# Altium PCB Hall_measurement_ver2.PcbDoc (part 1 of 2)
Units mm, origin at the board's own origin, x right, y up, seen from the top; angles counter-clockwise.
Board outline 60 x 140 mm, 4 copper layers (Top Layer, GND, Supply, Bottom Layer), stack 0.778 mm thick; 193 components, 95 nets, 656 pads, 140 vias.
Unrouted connection lines stored in the file: 276.
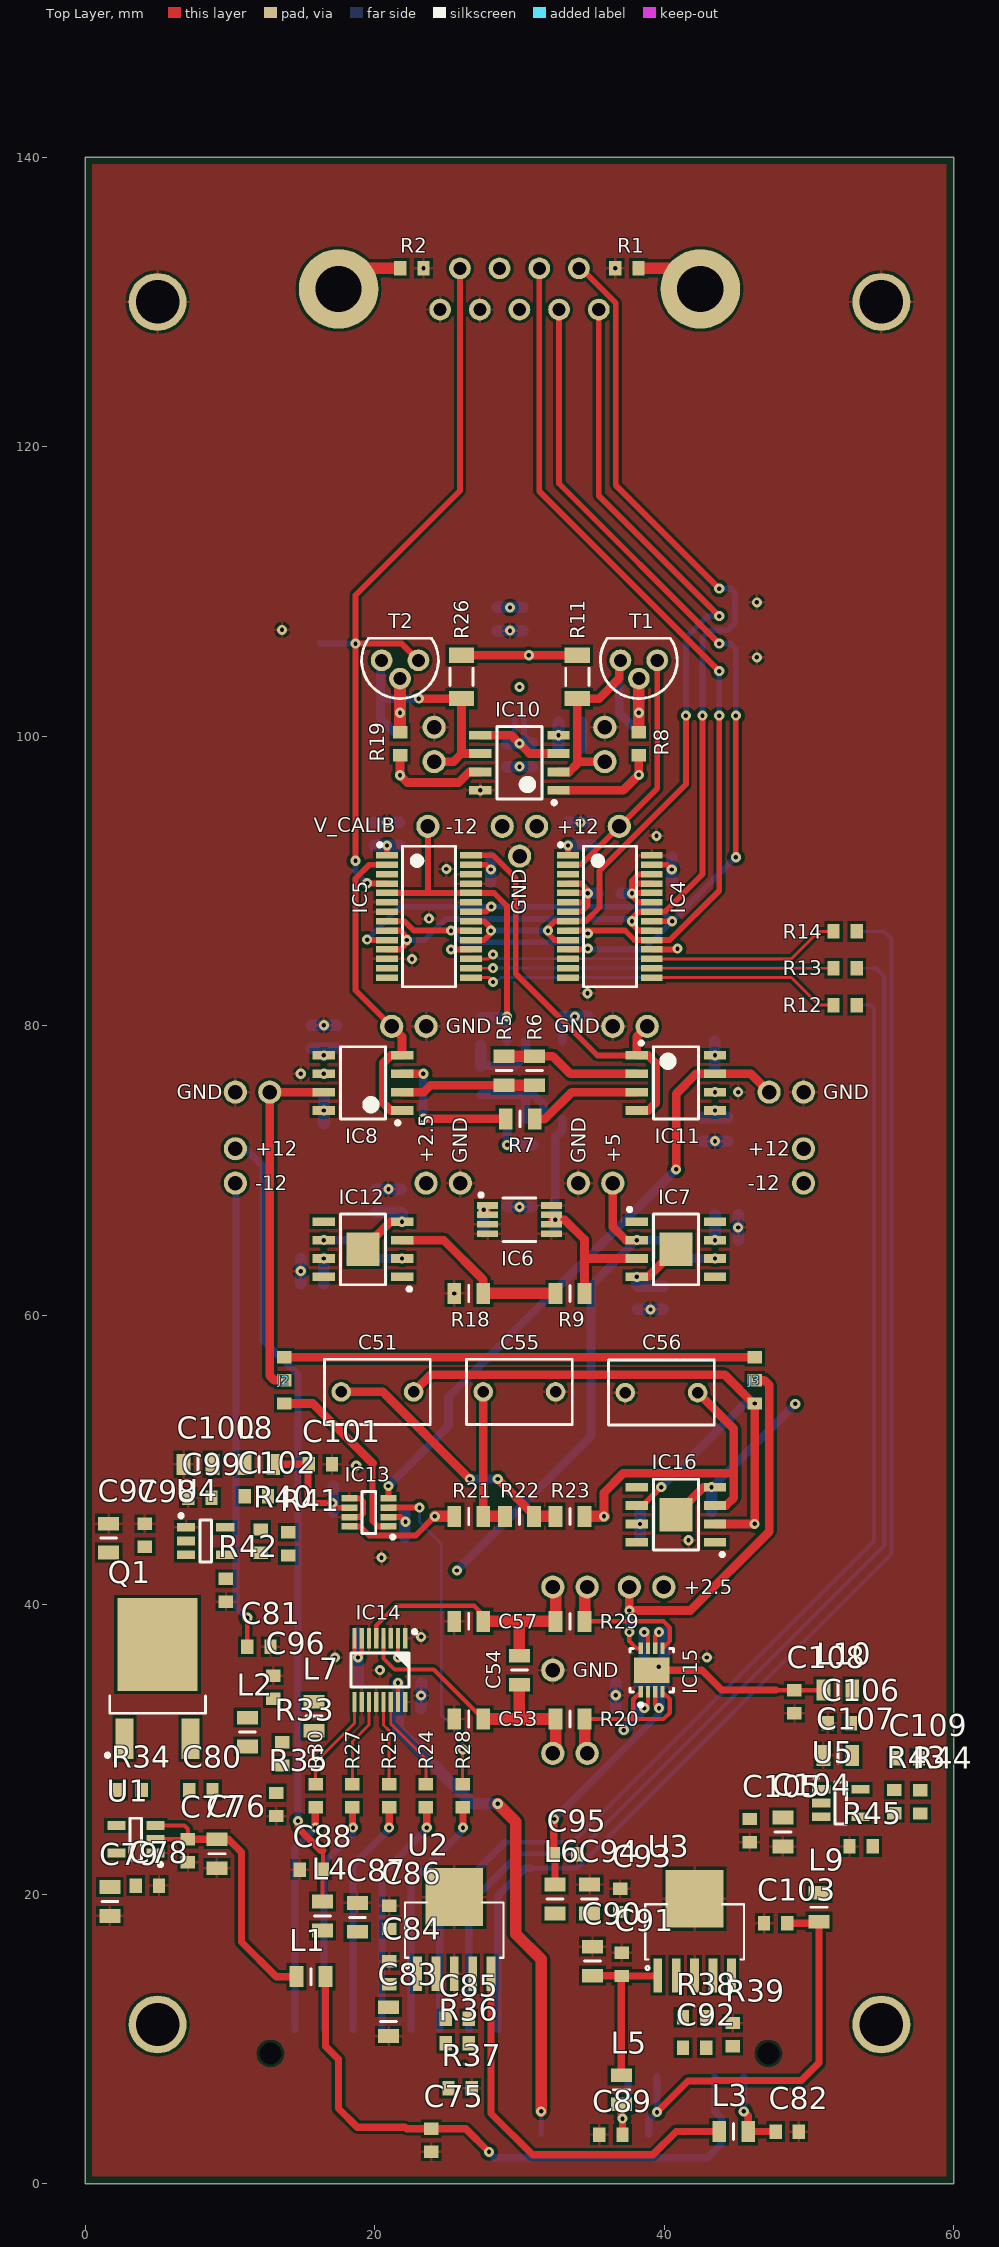
[diagram p0: Top Layer view]
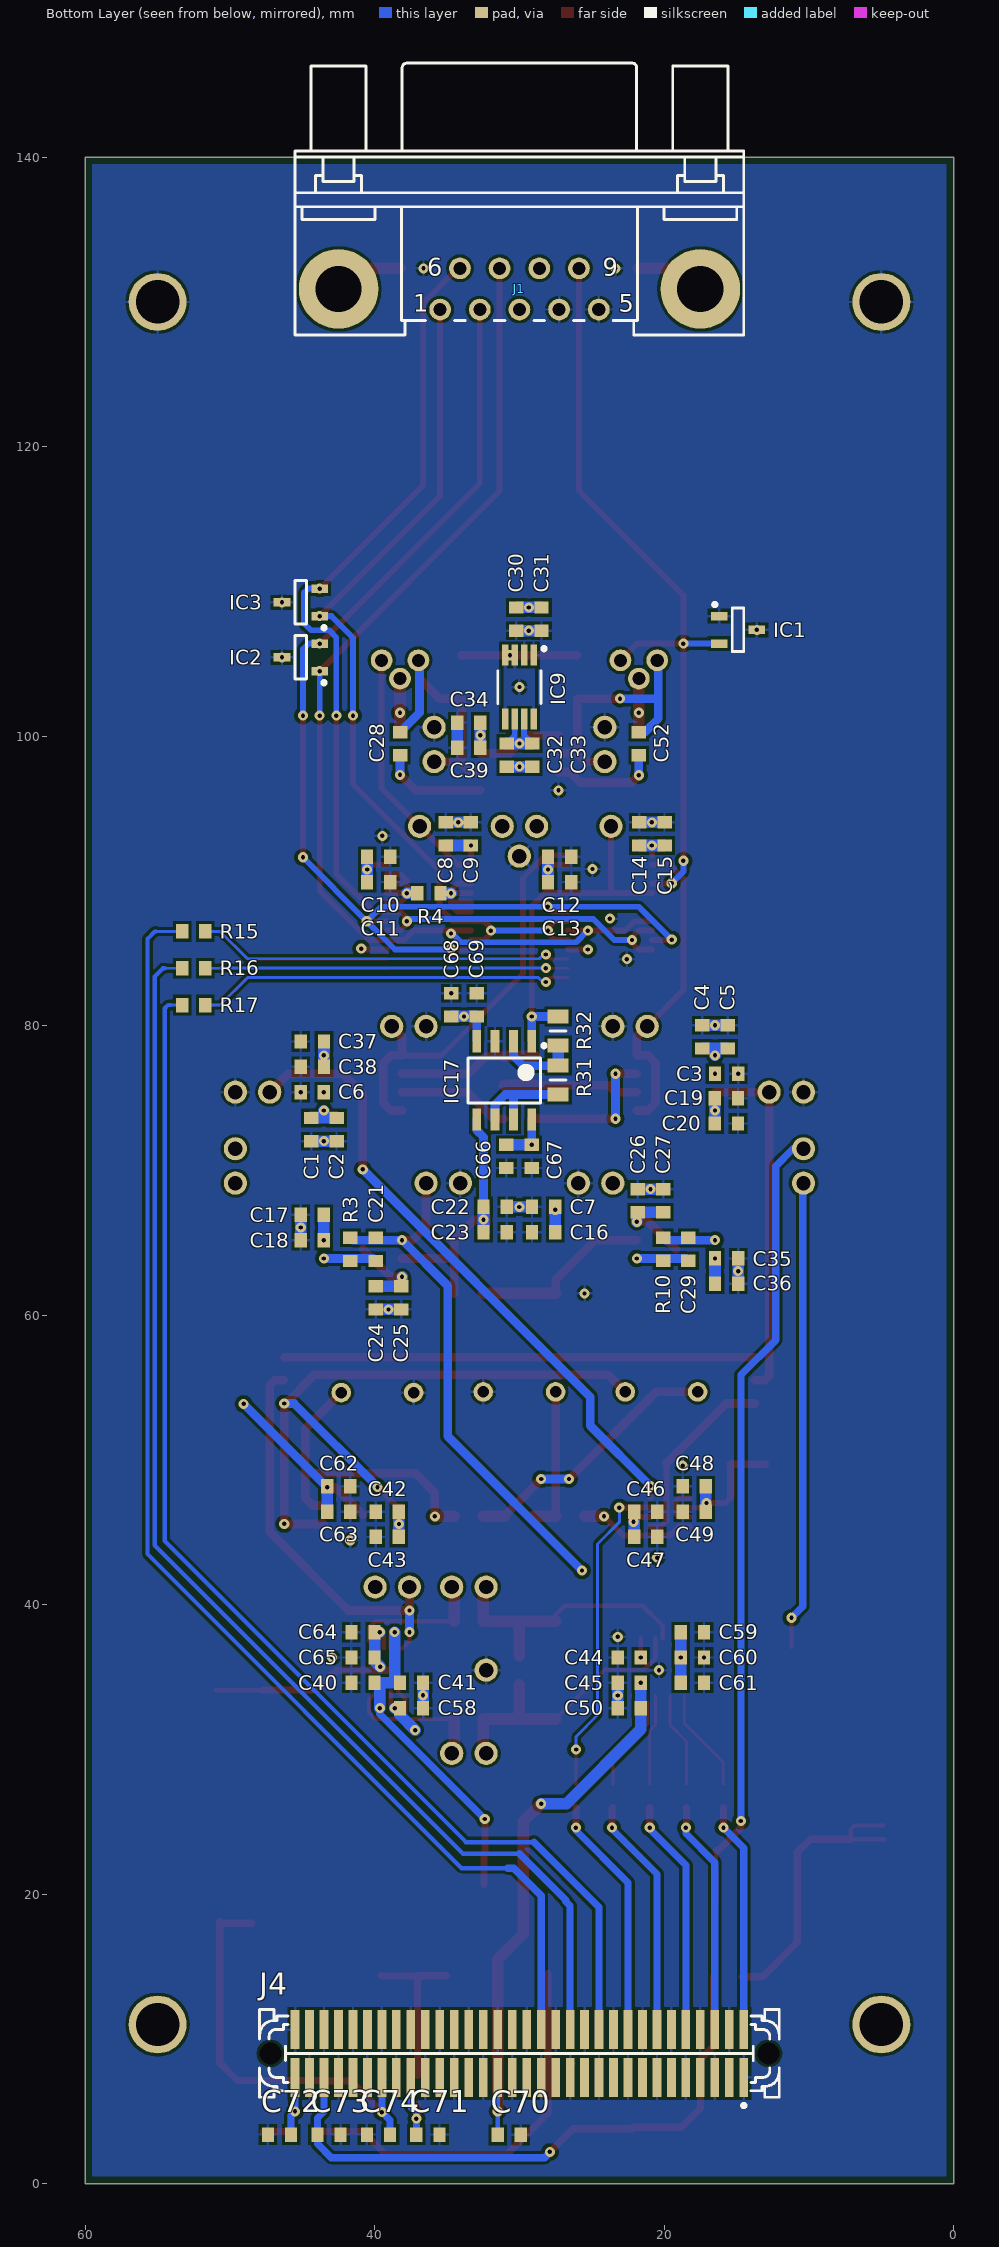
[diagram p1: Bottom Layer view, seen from below]
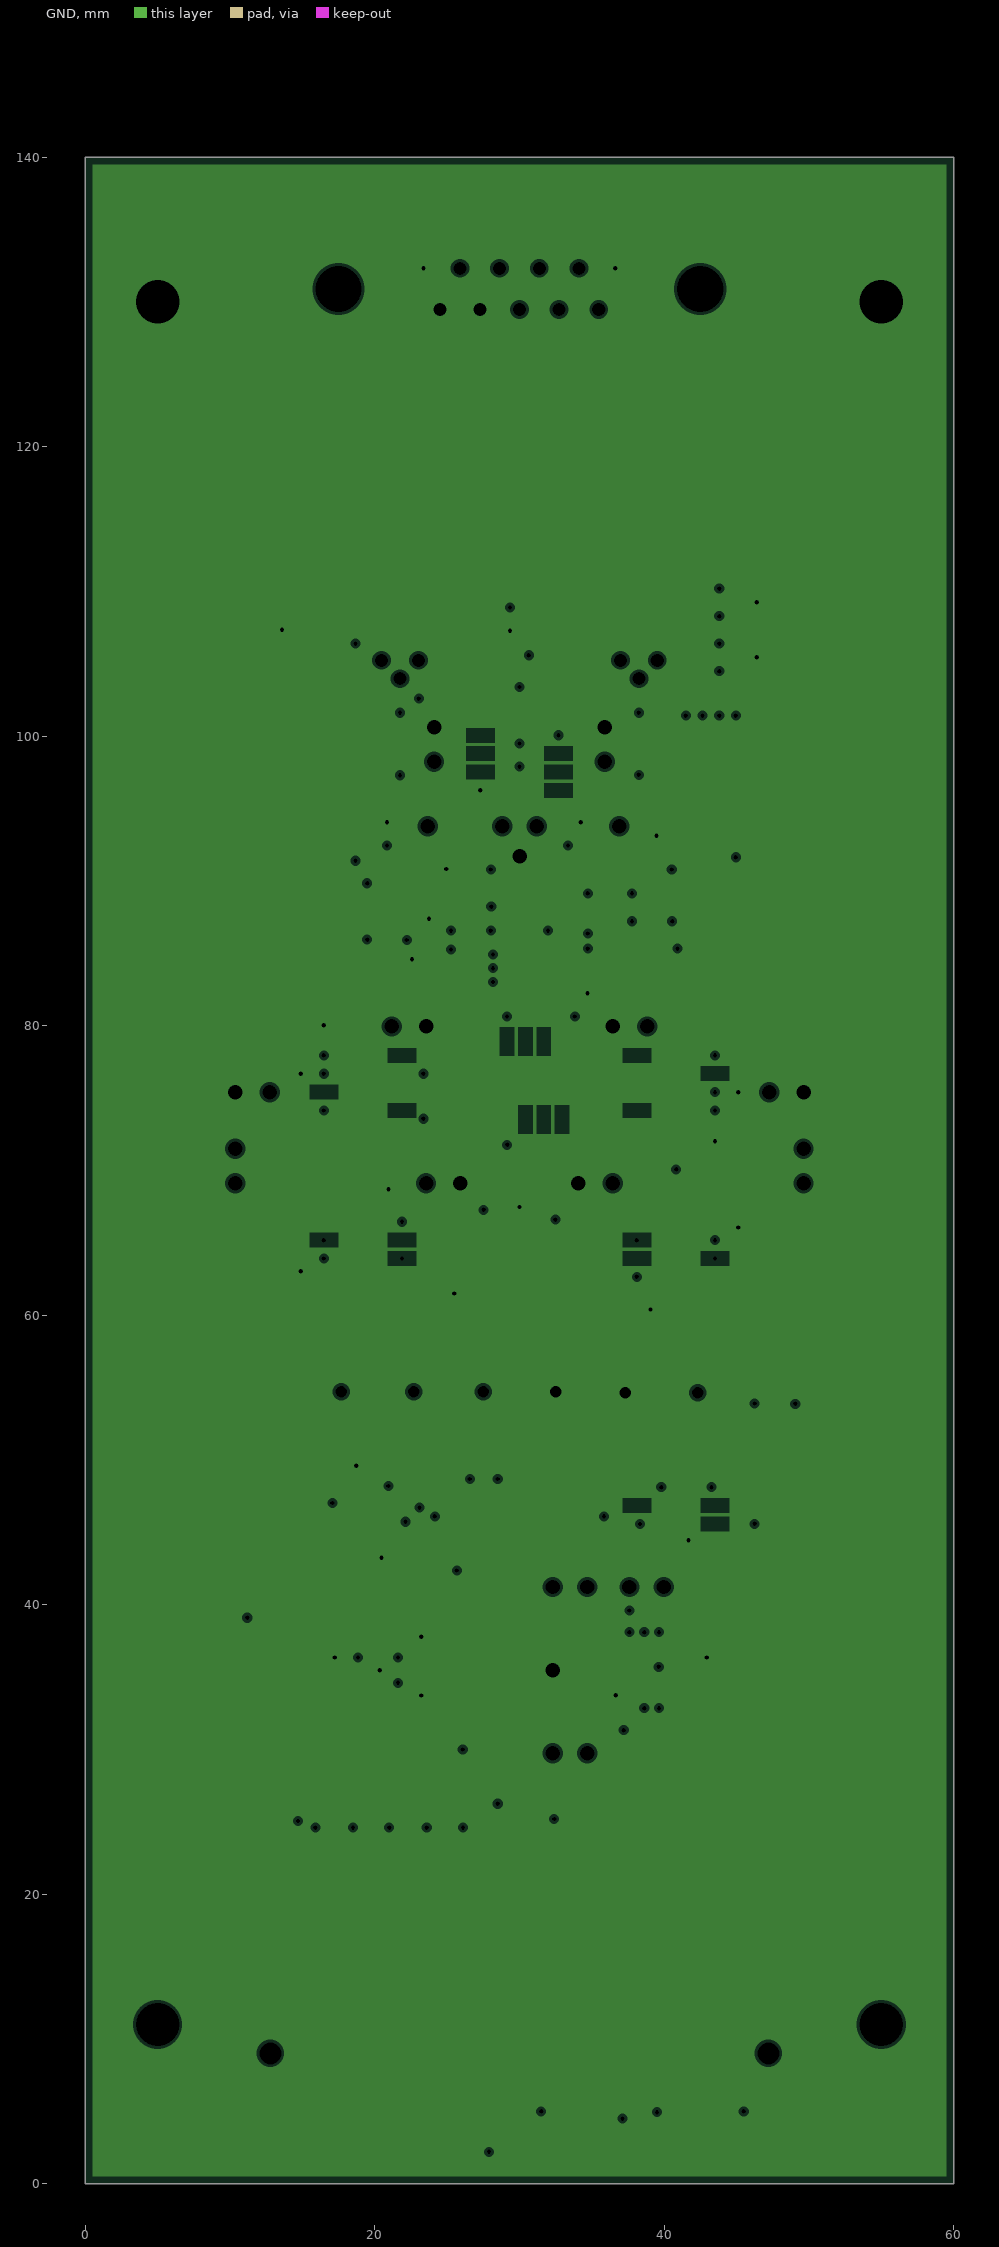
[diagram p2: GND, clearances drawn from the general rule]
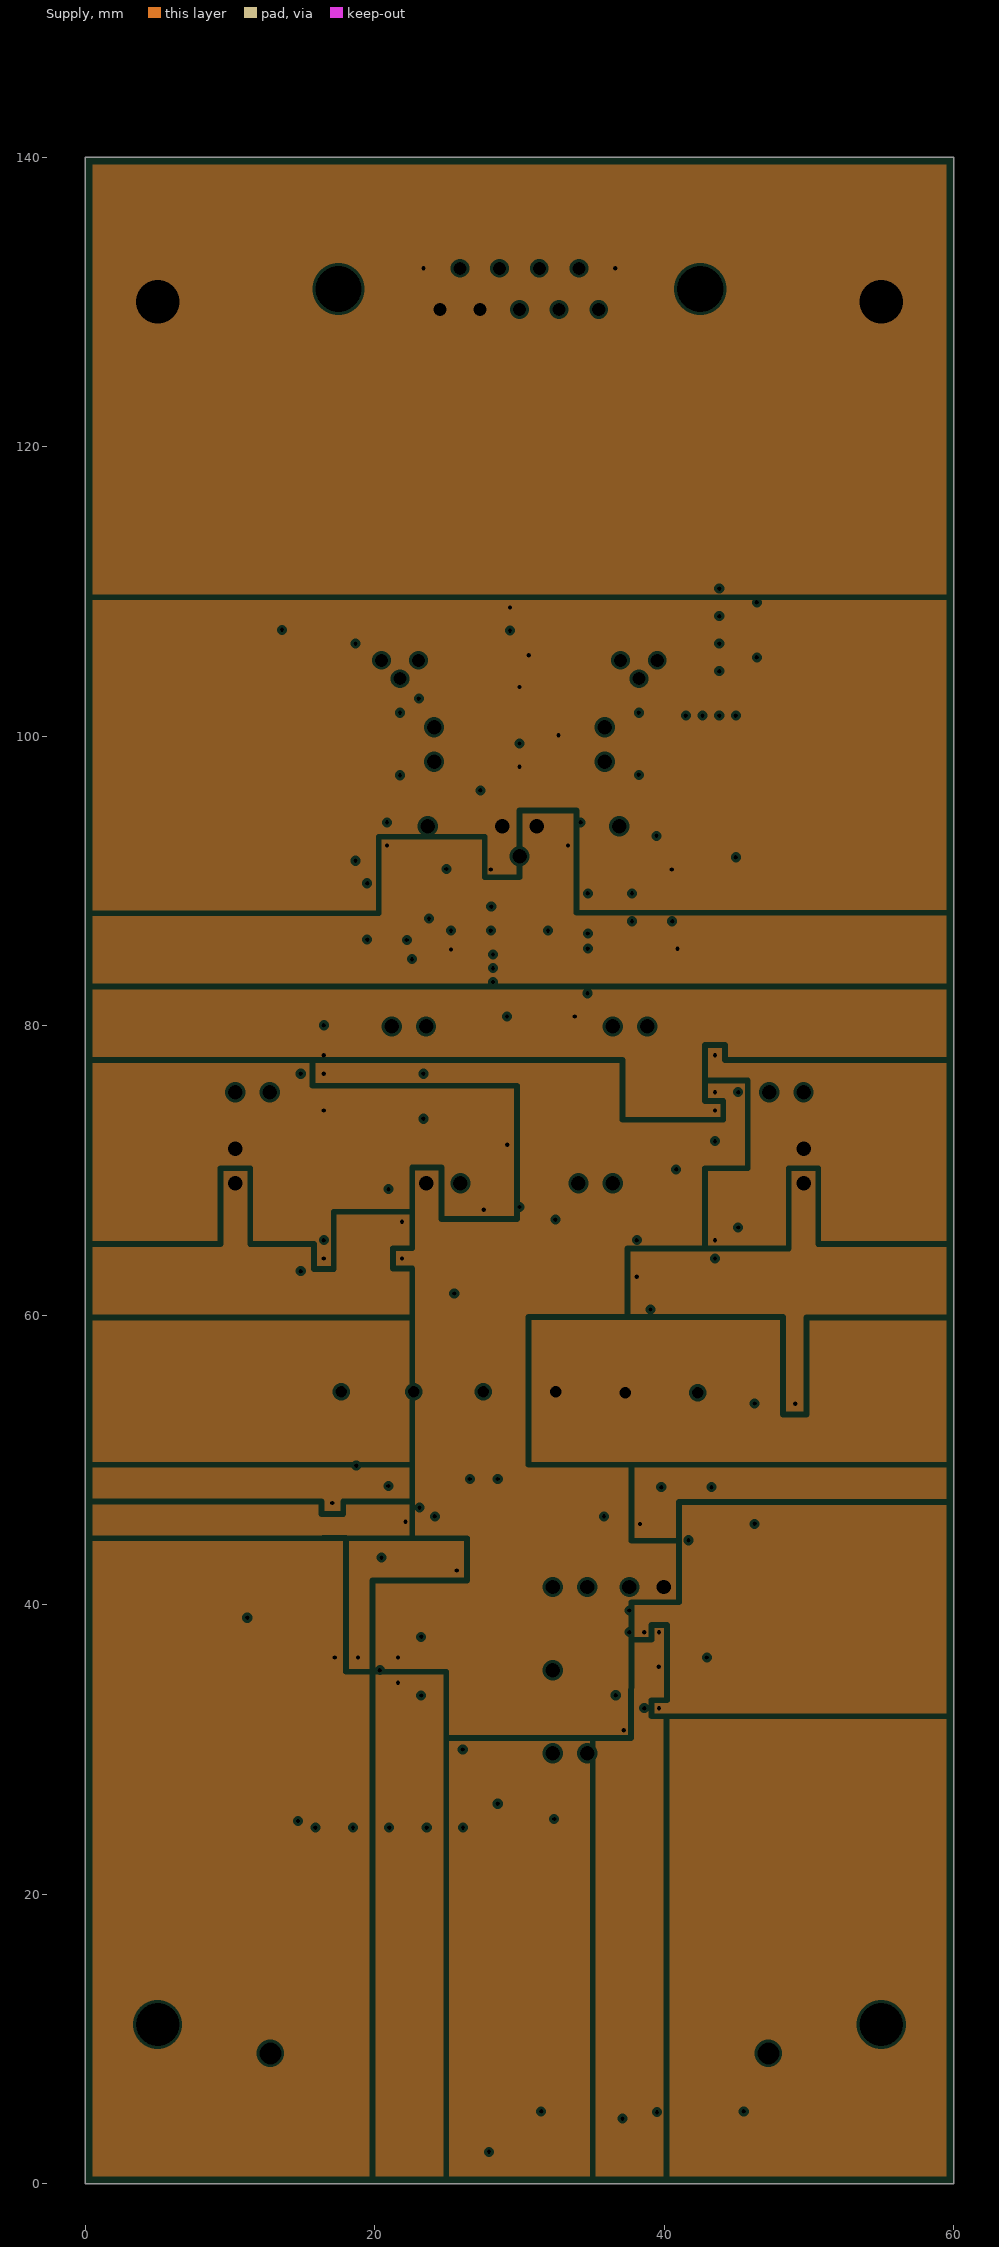
[diagram p3: Supply, clearances drawn from the general rule]
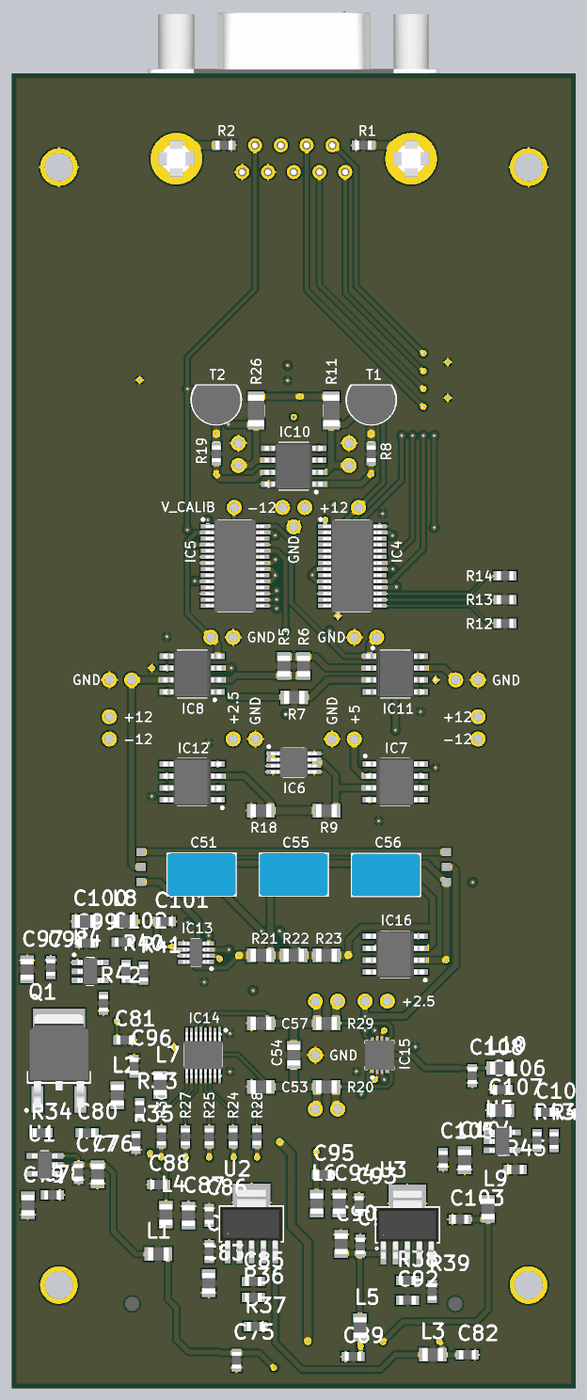
[diagram p5: 3D render of the assembled board from above, using the file's embedded part models]
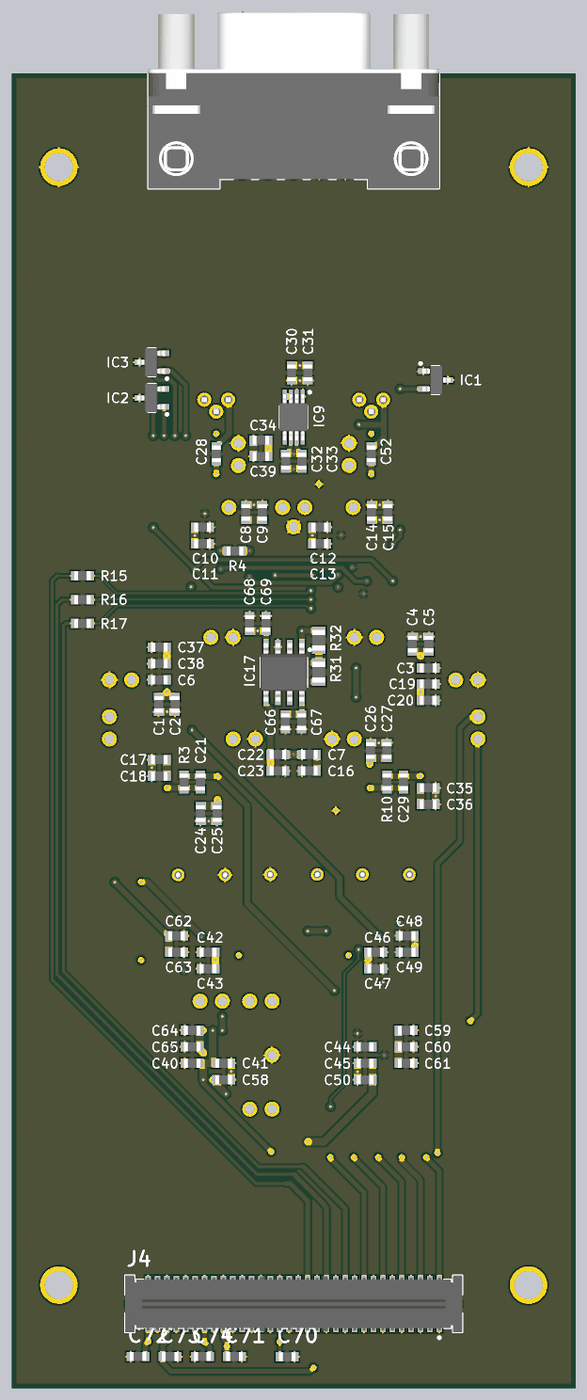
[diagram p6: 3D render of the assembled board from below, using the file's embedded part models]

## Layer stack, top to bottom
Top Solder: solder mask 0.0102, Solder Resist, Dk 3.5
Top Layer: signal copper 0.0356
Dielectric 1: core 0.254, FR-4, Dk 4.2
GND: plane copper 0.036, net THERMO_A
Dielectric 3: prepreg 0.127, Dk 4.2
Supply: plane copper 0.036, net (Multiple Nets)
Dielectric 2: core 0.254, Dk 4.2
Bottom Layer: signal copper 0.0356
Bottom Solder: solder mask 0.0102, Solder Resist, Dk 3.5

## Board outline
0,0 60,0 60,140 0,140

## Design rules (kind name [scope] priority, off if disabled: settings)
Clearance [All] p1: gap=0.2 ignorepadtopadclearanceinfootprint=FALSE except(0: Arc-Hole Track-Hole SMDPad-Hole THPad-Hole Via-Hole Fill-Hole Poly-Hole Region-Hole Text-Hole; 0.25: Arc-Via Track-Via SMDPad-Via THPad-Via Via-Via Via-Fill Via-Poly Via-Region)
HoleSize [All] p1: absolutevalues=TRUE maxlimit=3.2 minlimit=0.025 maxpercent=80.000 minpercent=20.000
HoleToHoleClearance [All] p1: gap=0.25 allowstackedmicrovias=TRUE
MinimumSolderMaskSliver [All] p1: minsoldermaskwidth=0.2
PlaneClearance [All] p1: clearance=0.2
PlaneConnect [All] p1: planeconnectstyle=Direct reliefexpansion=0.508 reliefentries=4 reliefconductorwidth=0.254 reliefairgap=0.254
PolygonConnect [All] p1: connectstyle=Relief reliefconductorwidth=0.2 reliefentries=4 polygonreliefangle="90 Angle" airgapwidth=0.2
RoutingVias [All] p1: holewidth=0.3 width=0.7 viastyle="Through Hole" minholewidth=0.3 minwidth=0.7 maxholewidth=1 maxwidth=1.6
SilkToSilkClearance [All] p1: silktosilkclearance=0.2
SilkToSolderMaskClearance [IsPad] p1: minsilkscreentomaskgap=0.2 clearancetoexposedcopper=TRUE
SolderMaskExpansion [All] p1: expansion=0.102
UnRoutedNet [All] p1: checkbadconnections=TRUE
Width [All] p1: maxlimit=1 minlimit=0.2 preferedwidth=0.2
22 further rules are at their usual default settings.

## Classes and differential pairs
component class Hall_LDOs: C75 C77 C78 C79 C80 C81 C82 C83 C84 C85 C86 C87 C88 C89 C90 C91 C92 C93 C94 C95 C96 C97 C98 C99 C100 C101 C102 C103 C104 C105 C106 C107 C108 C109 L1 L2 L3 L4 L5 L6 L7 L8 L9 L10 Q1 R33 R34 R35 R36 R37 R38 R39 R40 R41 R42 R43 R44 R45 U1 U2 U3 U4 U5
component class Hall_measurement: C1 C2 C3 C4 C5 C6 C7 C8 C9 C10 C11 C12 C13 C14 C15 C16 C17 C18 C19 C20 C21 C22 C23 C24 C25 C26 C27 C28 C29 C30 C31 C32 C33 C34 C35 C36 C37 C38 C39 C40 C41 C42 C43 C44 C45 C46 C47 C48 C49 C50 C51 C52 C53 C54 C55 C56 C57 C58 C59 C60 C61 C62 C63 C64 C65 C66 C67 C68 C69 C70 C71 C72 C73 C74 IC1 IC2 IC3 IC4 IC5 IC6 IC7 IC8 IC9 IC10 IC11 IC12 IC13 IC14 IC15 IC16 IC17 J1 J2 J3 J4 R1 R2 R3 R4 R5 R6 R7 R8 R9 R10 R11 R12 R13 R14 R15 R16 R17 R18 R19 R20 R21 R22 R23 R24 R25 R26 R27 R28 R29 R30 R31 R32 T1 T2

## Components (designator, comment, footprint, x,y, rotation, side; value= is the part's Value field where it differs from the comment)
C1 "100n" 0603 44.386,72.828 r270 bottom
C2 "100n" 0603 42.636,72.828 r270 bottom
C3 "100n" 0603 15.69,76.68 r180 bottom
C4 "10u" 0603 17.365,79.23 r270 bottom
C5 "10u" 0603 15.615,79.23 r270 bottom
C6 "10u" 0603 44.31,75.41 r180 bottom
C7 "100n" 0603 28.33,67.48 r0 bottom
C8 "100n" 0603 35.1,93.25 r270 bottom
C9 "10u" 0603 33.35,93.25 r270 bottom
C10 "100n" 0603 39.725,91.675 r0 bottom
C11 "10u" 0603 39.725,89.925 r0 bottom
C12 "100n" 0603 27.225,91.675 r0 bottom
C13 "10u" 0603 27.225,89.925 r0 bottom
C14 "100n" 0603 21.725,93.25 r270 bottom
C15 "10u" 0603 19.975,93.25 r270 bottom
C16 "10u" 0603 28.33,65.731 r0 bottom
C17 "100n" 0603 44.31,66.94 r180 bottom
C18 "10u" 0603 44.31,65.19 r0 bottom
C19 "100n" 0603 15.7,74.995 r0 bottom
C20 "10u" 0603 15.7,73.245 r180 bottom
C21 "=Value" 0603 39.925,64.55 r270 bottom
C22 "100n" 0603 31.68,67.48 r0 bottom
C23 "10u" 0603 31.68,65.73 r0 bottom
C24 "100n" 0603 39.925,61.2 r90 bottom
C25 "10u" 0603 38.175,61.2 r90 bottom
C26 "100n" 0603 21.824,67.91 r270 bottom
C27 "10u" 0603 20.075,67.91 r270 bottom
C28 "=Value" 0603 38.25,99.475 r270 bottom
C29 "=Value" 0603 18.324,64.56 r270 bottom
C30 "100n" 0603 30.225,108.095 r270 bottom
C31 "10u" 0603 28.475,108.095 r270 bottom
C32 "100n" 0603 30.875,98.695 r90 bottom
C33 "10u" 0603 29.125,98.695 r90 bottom
C34 "100n" 0603 33.5,100.945 r180 bottom
C35 "100n" 0603 15.689,63.92 r180 bottom
C36 "10u" 0603 15.689,62.17 r0 bottom
C37 "100n" 0603 44.3,78.91 r180 bottom
C38 "10u" 0603 44.3,77.16 r0 bottom
C39 "10u" 0603 33.5,99.195 r0 bottom
C40 "100n" 0603 40.808,34.605 r180 bottom
C41 "10u" 0603 37.458,34.605 r180 bottom
C42 "100n" 0603 39.135,46.43 r180 bottom
C43 "10u" 0603 39.135,44.68 r0 bottom
C44 "100n" 0603 22.411,36.355 r180 bottom
C45 "100n" 0603 22.411,34.605 r0 bottom
C46 "100n" 0603 21.274,46.43 r0 bottom
C47 "10u" 0603 21.274,44.68 r0 bottom
C48 "100n" 0603 17.924,48.18 r180 bottom
C49 "10u" 0603 17.924,46.43 r180 bottom
C50 "10u" 0603 22.411,32.855 r0 bottom
C51 "1u" CAPR500-450X730X950 20.189,54.705 r0 top
C52 "=Value" 0603 21.75,99.475 r270 bottom
C53 "3.9n" 0805 26.5,32.105 r180 top
C54 "3.9n" 0805 30,35.48 r270 top
C55 "1u" CAPR500-450X730X950 30,54.705 r180 top
C56 "1u" CAPR500-450X730X950 39.81,54.655 r0 top
C57 "3.9n" 0805 26.5,38.855 r0 top
C58 "100n" 0603 37.457,32.855 r0 bottom
C59 "22u" 0603 18.048,38.105 r0 bottom
C60 "22u" 0603 18.048,36.355 r0 bottom
C61 "22u" 0603 18.048,34.605 r0 bottom
C62 "100n" 0603 42.485,48.18 r0 bottom
C63 "10u" 0603 42.485,46.43 r180 bottom
C64 "100n" 0603 40.808,38.105 r180 bottom
C65 "10u" 0603 40.808,36.355 r0 bottom
C66 "100n" 0603 30.9,70.97 r90 bottom
C67 "10u" 0603 29.15,70.97 r270 bottom
C68 "100n" 0603 34.705,81.44 r270 bottom
C69 "10u" 0603 32.955,81.44 r90 bottom
C70 "100n" 0603 30.7,3.375 r0 bottom
C71 "100n" 0603 36.319,3.4 r0 bottom
C72 "100n" 0603 46.575,3.4 r180 bottom
C73 "100n" 0603 43.156,3.4 r0 bottom
C74 "100n" 0603 39.737,3.4 r180 bottom
C75 "100n" 0603 23.9,3 r90 top
C76 "2u2" 0805 9.1,22.8 r90 top
C77 "100n" 0603 7.1,23 r90 top
C78 "100n" 0603 4.3,20.6 r180 top
C79 "2u2" 0805 1.7,19.5 r90 top
C80 "100n" 0603 8,27.2 r0 top
C81 "100n" 0603 12,37.1 r180 top
C82 "100n" 0603 48.5,3.6 r180 top
C83 "2u2" 0805 20.959,11.2 r90 top
C84 "100n" 0603 21,14.575 r270 top
C85 "10n" 0603 25.7,11.4 r180 top
C86 "100n" 0603 21,18.4 r270 top
C87 "2u2" 0805 18.8,18.4 r270 top
C88 "100n" 0603 15.625,21.7 r0 top
C89 "100n" 0603 36.319,3.4 r0 top
C90 "2u2" 0805 35.05,15.375 r270 top
C91 "100n" 0603 37.075,15.15 r270 top
C92 "10n" 0603 42.1,9.4 r180 top
C93 "100n" 0603 36.95,19.575 r270 top
C94 "2u2" 0805 34.85,19.675 r270 top
C95 "100n" 0603 33.175,22.775 r180 top
C96 "100n" 0603 13,34.3 r270 top
C97 "2u2" 0805 1.625,44.6 r270 top
C98 "100n" 0603 4.125,44.8 r270 top
C99 "100n" 0603 7.925,47.4 r0 top
C100 "2u2" 0805 7.8,49.7 r0 top
C101 "100n" 0603 16.25,49.7 r180 top
C102 "100n" 0603 11.825,47.5 r180 top
C103 "100n" 0603 47.7,18 r0 top
C104 "2u2" 0805 48.2,24.3 r90 top
C105 "100n" 0603 45.9,24.4 r90 top
C106 "100n" 0603 52.1,31.8 r0 top
C107 "2u2" 0805 52,29.6 r0 top
C108 "100n" 0603 49,33.3 r90 top
C109 "100n" 0603 56.8,29.4 r180 top
IC1 "PESD12VL2BT" SOT95P280X115-3N 14.9,107.345 r180 bottom
IC2 "PESD12VL2BT" SOT95P280X115-3N 45.1,105.445 r0 bottom
IC3 "PESD12VL2BT" SOT95P280X115-3N 45.1,109.245 r0 bottom
IC4 "ADG1207" SOP65P640X120-28N 36.25,87.545 r0 top
IC5 "ADG1207" SOP65P640X120-28N 23.75,87.545 r0 top
IC6 "LTC6655B-5" SOP65P488X110-8N 30,66.605 r0 top
IC7 "ADA4898-1" SOIC127P600X175-9N-S229 40.81,64.555 r0 top
IC8 "AD8429" SOIC127P600X175-8N 19.191,76.045 r180 top
IC9 "LTC6655B-5" SOP65P488X110-8N 30,103.395 r270 bottom
IC10 "AD8676" SOIC127P600X175-8N 30,98.165 r180 top
IC11 "AD8429" SOIC127P600X175-8N 40.81,76.045 r0 top
IC12 "ADA4898-1" SOIC127P600X175-9N-S229 19.189,64.555 r180 top
IC13 "MAX4564" SOT65P280X100-8N 19.599,46.38 r180 top
IC14 "LTC2379-18" SOP50P490X110-16N 20.361,35.48 r270 top
IC15 "LT6350" SON50P300X300X80-9N-R175X248 39.132,35.48 r90 top
IC16 "ADA4898-1" SOIC127P600X175-9N-S229 40.81,46.218 r180 top
IC17 "ADA4522-2" SOIC127P600X175-8N 31.05,76.22 r270 bottom
J1 "=Family" TYCO_5747844-5 30,130.9 r180 bottom
J2 "Jumper" JUMPER 13.75,57.105 r270 top
J3 "Jumper" JUMPER 46.25,57.105 r270 top
J4 "PCI_PMC" TYCO_120527-1 12.8,9 r0 bottom locked
L1 "BLM211k" 0805 15.6,14.3 r180 top value=1k
L2 "BLM211k" 0805 11.2,31.2 r90 top value=1k
L3 "BLM211k" 0805 44.8,3.6 r180 top value=1k
L4 "BLM211k" 0805 16.4,18.5 r90 top value=1k
L5 "BLM211k" 0805 37.041,6.49 r90 top value=1k
L6 "BLM211k" 0805 32.45,19.675 r90 top value=1k
L7 "BLM211k" 0805 15.8,32.3 r90 top value=1k
L8 "BLM211k" 0805 12,49.7 r0 top value=1k
L9 "BLM211k" 0805 50.7,19.1 r90 top value=1k
L10 "BLM211k" 0805 52,34.1 r180 top value=1k
Q1 "MJD2955" DPAK 5,34.9 r90 top
R1 "1M" 0603 37.425,132.322 r0 top
R2 "1M" 0603 22.575,132.322 r180 top
R3 "22" 0603 41.675,64.55 r90 bottom
R4 "1k" 0603 36.25,89.145 r0 bottom
R5 "120" 0805 28.95,76.895 r270 top
R6 "120" 0805 31.05,76.895 r270 top
R7 "DNP" 0805 30.05,73.57 r180 top
R8 "22" 0603 38.25,99.475 r90 top
R9 "1k" 0805 33.5,61.505 r0 top
R10 "22" 0603 20.074,64.56 r270 bottom
R11 "5k" 1206 34,104.095 r270 top
R12 "22" 0603 52.5,81.43 r180 top
R13 "22" 0603 52.5,83.97 r180 top
R14 "22" 0603 52.5,86.51 r180 top
R15 "22" 0603 52.5,86.51 r180 bottom
R16 "22" 0603 52.5,83.97 r180 bottom
R17 "22" 0603 52.5,81.43 r180 bottom
R18 "1k" 0805 26.5,61.505 r0 top
R19 "22" 0603 21.75,99.475 r90 top
R20 "22" 0805 33.5,32.105 r180 top
R21 "1k" 0805 26.5,46.105 r0 top
R22 "1k" 0805 30,46.105 r0 top
R23 "1k" 0805 33.5,46.105 r0 top
R24 "22" 0603 23.54,26.8 r270 top
R25 "22" 0603 21,26.8 r270 top
R26 "100k" 1206 26,104.095 r270 top
R27 "22" 0603 18.46,26.8 r270 top
R28 "22" 0603 26.08,26.8 r90 top
R29 "22" 0805 33.5,38.855 r180 top
R30 "22" 0603 15.92,26.8 r270 top
R31 "10k" 0805 27.325,76.245 r90 bottom
R32 "150" 0805 27.325,79.64 r90 bottom
R33 "18k" 0603 13.6,29.7 r90 top
R34 "47k" 0603 3.1,27.2 r0 top
R35 "1k6" 0603 13.2,26.2 r90 top
R36 "16k" 0603 25.7,9.7 r180 top
R37 "1k5" 0603 25.9,6.6 r180 top
R38 "4k7" 0603 42.1,11.5 r180 top
R39 "1k3" 0603 44.725,10.3 r270 top
R40 "47k" 0603 12.125,44.4 r90 top
R41 "15k" 0603 14.025,44.2 r90 top
R42 "12k" 0603 9.725,41 r90 top
R43 "8k2" 0603 55.9,26.4 r90 top
R44 "16k" 0603 57.7,26.375 r90 top
R45 "12k" 0603 53.6,23.3 r0 top
T1 "BS270" TO-92AA-P127 38.25,105.245 r180 top
T2 "BS270" TO-92AA-P127 21.75,105.245 r180 top
U1 "ADP7182ADJ" SOT23-5 3.5,23.8 r180 top value=ADJ
U2 "REG104GAADJ" SOT223_6-127 25.5,17.514 r0 top value=ADJ
U3 "REG104GAADJ" SOT223_6-127 42.1,17.4 r0 top value=ADJ
U4 "ADP7182ADJ" SOT23-5 8.325,44.4 r0 top value=ADJ
U5 "ADP7182ADJ" SOT23-5 52.2,26.3 r0 top value=ADJ

## Footprints (in the part's own frame and the unit in brackets; to place one, negate y for a bottom-side part, rotate by r counter-clockwise, add the part's x,y. Pads: shape width x height; smd on the part's side, far side on the other; paste and mask are expansions set on the pad)
0603 [mm] "Chip Resistor, EIA 0603, Metric 1608, Body 1.6x0.8mm, IPC Medium Density"
  rect 0.85x1 smd: 1(-0.8,0) 2(0.8,0)
  body extent -0.87,-0.47 0.88,0.48, height 0.6
0805 [mm] "Chip Resistor, EIA 0805, Metric 2012, Body 2.0x1.25mm, IPC Medium Density"
  rect 0.95x1.45 smd: 1(-1,0) 2(1,0)
  silkscreen extent 0,-0.55 0,0.55, body extent -1.1,-0.67 1.1,0.68, height 0.5
1206 [mm] "Chip Resistor, EIA 1206, Metric 3216, Body 3.2x1.6mm, IPC Medium Density"
  rect 1.05x1.75 smd: 1(-1.5,0) 2(1.5,0)
  silkscreen extent -0.6,-0.8 0.6,0.8, body extent -1.67,-0.87 1.68,0.88, height 0.51
CAPR500-450X730X950 [mm] "Capacitor Radial, Pin spacing 5.0mm - Body With 4.5mm X Body Length 7.3mm X Body Height 9.5mm"
  round 1.35 hole 0.8: 1(-2.5,0) 2(2.5,0)
  silkscreen extent -3.65,-2.25 3.65,2.25, body extent -3.65,-2.25 3.65,2.25, height 9.5
DPAK [mm] "TO-252AA DPAK TO, 2.28mm pitch; 2 pin,9.90mm L X 6.56mm W X 2.38mm H body, IPC Medium Density"
  rect 2.8x1.25 smd: 1(-4.15,2.28) 2(-4.15,-2.28)
  rect 6.4x5.55 smd: 3(2.35,0)
  silkscreen extent -5.42,-3.3 -1.2,3.57, body extent -4.99,-3.27 4.95,3.27, height 2.28
JUMPER [mm] "Jumper, SMD"
  rect 0.85x1 smd: 1(0,0) 2(1.6,0) 3(3.2,0)
SOIC127P600X175-8N [mm] "SOIC 8, Pitch 1.27mm - Body 4x5mm, IPC Medium Density"
  rect 1.55x0.6 smd: 1(-2.7,1.905) 2(-2.7,0.635) 3(-2.7,-0.635) 4(-2.7,-1.905) 5(2.7,-1.905) 6(2.7,-0.635) 7(2.7,0.635) 8(2.7,1.905)
  silkscreen extent -2.53,-2.5 1.55,2.88, body extent -3.1,-2.5 3.1,2.5, height 1.75
SOIC127P600X175-9N-S229 [mm] "SOIC 8, 1.27mm Pitch; 8 pin, 3.90mm W X 4.90mm L X 1.75mm H body, (w/thermal tab 2.29mm X 2.29mm), IPC Medium Density"
  rect 1.55x0.6 smd: 1(-2.7,1.905) 2(-2.7,0.635) 3(-2.7,-0.635) 4(-2.7,-1.905) 5(2.7,-1.905) 6(2.7,-0.635) 7(2.7,0.635) 8(2.7,1.905)
  rect 2.29x2.29 smd: 9(0,0)
  silkscreen extent -3.32,-2.45 1.55,2.87, body extent -3.1,-2.5 3.1,2.5, height 1.75
SON50P300X300X80-9N-R175X248 [mm] "SON, (DFN) 0.50mm,pitch; 8 pin,3.00mm W X 3.00mm L X 0.80mm H body (w/thermal tab 1.75 X2.48mm), IPC Medium Density"
  rect 0.8x0.3 smd: 1(-1.5,0.75) 2(-1.5,0.25) 3(-1.5,-0.25) 4(-1.5,-0.75) 5(1.5,-0.75) 6(1.5,-0.25) 7(1.5,0.25) 8(1.5,0.75)
  rect 1.75x2.45 smd: 9(0,0)
  silkscreen extent -2.52,-1.5 1.5,1.5, body extent -1.55,-1.55 1.55,1.55, height 0.8
SOP50P490X110-16N [mm] "SOP, 0.50mm Pitch; 16 Pin, 3.00mm W X 4.039mm L X 1.10mm H Body, IPC Medium Density"
  rect 1.4x0.3 smd: 1(-2.2,1.75) 2(-2.2,1.25) 3(-2.2,0.75) 4(-2.2,0.25) 5(-2.2,-0.25) 6(-2.2,-0.75) 7(-2.2,-1.25) 8(-2.2,-1.75) 9(2.2,-1.75) 10(2.2,-1.25) 11(2.2,-0.75) 12(2.2,-0.25) 13(2.2,0.25) 14(2.2,0.75) 15(2.2,1.25) 16(2.2,1.75)
  silkscreen extent -2.77,-2 1.17,2.53, body extent -2.47,-2.07 2.47,2.07, height 1.1
SOP65P488X110-8N [mm] "SOP, 8-Leads, Body 3x3mm (max), Pitch 0.65mm, IPC Medium Density"
  rect 1.45x0.45 smd: 1(-2.2,0.975) 2(-2.2,0.325) 3(-2.2,-0.325) 4(-2.2,-0.975) 5(2.2,-0.975) 6(2.2,-0.325) 7(2.2,0.325) 8(2.2,0.975)
  silkscreen extent -2.77,-1.5 1.13,1.82, body extent -2.45,-1.55 2.45,1.55, height 1.1
SOP65P640X120-28N [mm] "SOP, 0.65mm Pitch; 28 Pin, 4.40mm W X 9.70mm L X 1.20mm H body, IPC Medium Density"
  rect 1.5x0.45 smd: 1(-2.9,4.225) 2(-2.9,3.575) 3(-2.9,2.925) 4(-2.9,2.275) 5(-2.9,1.625) 6(-2.9,0.975) 7(-2.9,0.325) 8(-2.9,-0.325) 9(-2.9,-0.975) 10(-2.9,-1.625) 11(-2.9,-2.275) 12(-2.9,-2.925) 13(-2.9,-3.575) 14(-2.9,-4.225) 15(2.9,-4.225) 16(2.9,-3.575) 17(2.9,-2.925) 18(2.9,-2.275) 19(2.9,-1.625) 20(2.9,-0.975) 21(2.9,-0.325) 22(2.9,0.325) 23(2.9,0.975) 24(2.9,1.625) 25(2.9,2.275) 26(2.9,2.925) 27(2.9,3.575) 28(2.9,4.225)
  silkscreen extent -3.52,-4.85 1.83,5.07, body extent -3.12,-4.9 3.12,4.9, height 1.2
SOT23-5 [mm] "SOT, 0.95mm Pitch; 5 Pin,1.55mm W X 2.90mm L X 1.45mm H body, IPC Medium Density"
  rect 1.25x0.6 smd: 1(-1.35,0.95) 2(-1.35,0) 3(-1.35,-0.95) 4(1.35,-0.95) 5(1.35,0.95)
  silkscreen extent -1.83,-1.45 0.4,1.87, body extent -1.35,-1.45 1.35,1.45, height 1.45
SOT65P280X100-8N [mm] "SOT, 0.65mm pitch; 8 pin, 1.625mm W X 2.90mm L X 1.00mm H body, IPC Medium Density"
  rect 1.1x0.45 smd: 1(-1.35,0.975) 2(-1.35,0.325) 3(-1.35,-0.325) 4(-1.35,-0.975) 5(1.35,-0.975) 6(1.35,-0.325) 7(1.35,0.325) 8(1.35,0.975)
  silkscreen extent -1.78,-1.45 0.48,1.82, body extent -1.4,-1.5 1.4,1.5, height 1
SOT95P280X115-3N [mm] "SOT23, 0.95mm, pitch;3 pin,1.55mm W X 2.95mm L X 1.15mm H body, IPC Medium Density"
  rect 1.15x0.6 smd: 1(-1.3,0.95) 2(-1.3,-0.95) 3(1.3,0)
  silkscreen extent -1.73,-1.5 0.4,1.87, body extent -1.4,-1.5 1.6,1.5, height 1.15
SOT223_6-127 [mil]
  rect 24x93 smd paste+0 mask+0: 1(-100,-118.5) 2(-50,-118.5) 3(0,-118.5) 4(50,-118.5) 5(100,-118.5)
  rect 157.48x157.48 smd: 6(0,90)
  silkscreen extent -134,-103 134,75, body extent -129,-143 129,143, height 71
TO-92AA-P127 [mm] "TO-92 (TO-226),  Pitch 1.27mm, Flat Index, 3 In-Line, Axial Leads, Body Dia. 5.3mm, Leads Dia. 0.5mm (max)"
  round 1.5 hole 0.9: 1(-1.27,0) 2(0,1.27) 3(1.27,0)
  silkscreen extent -2.65,-1.52 2.65,4.1, body extent -2.58,-1.53 2.58,2.64, height 9.33
TYCO_120527-1 [mm] "1mm Centerline, FH (IEEE 1386) Surface Mount, Stacking Board-to-Board Male Connectors"
  rect 0.6x2.7 smd: 1(1.7,1.65) 2(1.7,-1.65) 3(2.7,1.65) 4(2.7,-1.65) 5(3.7,1.65) 6(3.7,-1.65) 7(4.7,1.65) 8(4.7,-1.65) 9(5.7,1.65) 10(5.7,-1.65) 11(6.7,1.65) 12(6.7,-1.65) 13(7.7,1.65) 14(7.7,-1.65) 15(8.7,1.65) 16(8.7,-1.65) 17(9.7,1.65) 18(9.7,-1.65) 19(10.7,1.65) 20(10.7,-1.65) 21(11.7,1.65) 22(11.7,-1.65) 23(12.7,1.65) 24(12.7,-1.65) 25(13.7,1.65) 26(13.7,-1.65) 27(14.7,1.65) 28(14.7,-1.65) 29(15.7,1.65) 30(15.7,-1.65) 31(16.7,1.65) 32(16.7,-1.65) 33(17.7,1.65) 34(17.7,-1.65) 35(18.7,1.65) 36(18.7,-1.65) 37(19.7,1.65) 38(19.7,-1.65) 39(20.7,1.65) 40(20.7,-1.65) 41(21.7,1.65) 42(21.7,-1.65) 43(22.7,1.65) 44(22.7,-1.65) 45(23.7,1.65) 46(23.7,-1.65) 47(24.7,1.65) 48(24.7,-1.65) 49(25.7,1.65) 50(25.7,-1.65) 51(26.7,1.65) 52(26.7,-1.65) 53(27.7,1.65) 54(27.7,-1.65) 55(28.7,1.65) 56(28.7,-1.65) 57(29.7,1.65) 58(29.7,-1.65) 59(30.7,1.65) 60(30.7,-1.65) 61(31.7,1.65) 62(31.7,-1.65) 63(32.7,1.65) 64(32.7,-1.65)
  round 1 hole 1.5 unplated: 65(0,0) 66(34.4,0)
  silkscreen extent -0.75,-3.03 35.15,3.72, body extent -0.75,-3.03 35.15,3.03, height 8.38
TYCO_5747844-5 [mm] "Right Angle 9 Female Contacts D-SUB Connector With PCB Mount Retention , Grounding Straps, and Fixed UNC 4-40 Female Screwlocks"
  round 1.5 hole 0.9: 1(-5.48,-1.422) 2(-2.74,-1.422) 3(0,-1.422) 4(2.74,-1.422) 5(5.48,-1.422) 6(-4.11,1.422) 7(-1.37,1.422) 8(1.37,1.422) 9(4.11,1.422)
  round 5.5 hole 3.2: 10(-12.495,0) 11(12.495,0)
  silkscreen extent -15.49,-3.19 15.49,15.6, body extent -15.49,-3.19 15.49,15.71, height 12.55

## Part data
C1 C2 C3 C4 C5 C6 C7 C8 C9 C10 C11 C12 C13 C14 C15 C16 C17 C18 C19 C20 C21 C22 C23 C24 C25 C26 C27 C28 C29 C30 C31 C32 C33 C34 C35 C36 C37 C38 C39 C40 C41 C42 C43 C44 C45 C46 C47 C48 C49 C50 C52 C53 C54 C57 C58 C59 C60 C61 C62 C63 C64 C65 C66 C67 C68 C69 C70 C71 C72 C73 C74 C75 C76 C77 C78 C79 C80 C81 C82 C83 C84 C85 C86 C87 C88 C89 C90 C91 C92 C93 C94 C95 C96 C97 C98 C99 C100 C101 C102 C103 C104 C105 C106 C107 C108 C109: library part Capacitor
C51 C55 C56: library part "Capacitor 4.5mm x 7.3mm"
IC4 IC5: "8-channel multiplexer"
IC6 IC9: "Reference, 5 V"
IC7 IC12 IC16: "Op amp"
IC8 IC11: "1 nV/sqrt Hz Low Noise Instrumentation Amplifier"
IC10 IC17: "Dual Op Amp"
IC13: "Switch"
IC14: "ADC"
IC15: "ADC driver"
J1: library part "Connector D-sub 2x9 Female", "Connector D-sub 2x9 Female"
J4: "PCI Mezzanine Connector; IEEE 1386 Mezzanine board", Manufactuer="TE Connectivity", PartField=120527-1, Pkg="PMC Male (IEEE 1386)", SolderOption=2, Vendor="TE Connectivity"
L1 L2 L3 L4 L5 L6 L7 L8 L9 L10: library part BLM21, "SMD Ferrite bead 0805", Device=BLM21, Pkg=SMD0805, Price=10, SMD Solders=2, Solder Option=RM, Vendor=Vishay
Q1: "PNP транзистор", Voltage=-60V, Device=MJD2955, Name to order=MJD29G55, Pkg=DPAK, Price=100, SMD Solders=3, Solder Option=RM, Vendor="ON Semiconductor"
R1 R2 R3 R4 R5 R6 R7 R8 R9 R10 R11 R12 R13 R14 R15 R16 R17 R18 R19 R20 R21 R22 R23 R24 R25 R26 R27 R28 R29 R30 R31 R32 R33 R34 R35 R36 R37 R38 R39 R40 R41 R42 R43 R44 R45: library part Resistor
T1 T2: library part Transistor
U1 U4 U5: library part ADP7182, "Negative LDO Linear stabilizer", Device=ADP7182, Name to order=ADP7182AUJZ-R7, Pkg=SOT23-5, Price=100, SMD Solders=5, Solder Option=RM, Vendor="Analog Devoces", Vref=1V22
U2 U3: library part REG104GA, "Positive LDO Linear stabilizer", Tolerance="+-2% Max", Device=REG104GA, Name to order=REG104GA-A, Pkg=SOT223-6, Price=1000, SMD Solders=6, Solder Option=RM, TC=70ppm/C, Vendor="Texas Instruments", Vref=1V295

## Free pads (board coordinates)
  round 4 hole 3: 0(5,11) 0(5,130) 0(55,11) 0(55,130)
  round 1.6 hole 1: ""(10.375,69.125) ""(10.375,71.5) ""(10.375,75.41) ""(12.75,75.41) ""(21.174,79.95) ""(23.549,69.125) ""(23.549,79.95) ""(23.675,93.775) ""(24.105,98.244) ""(24.105,100.619) ""(25.924,69.125) ""(28.813,93.775) ""(30.009,91.714) ""(31.188,93.775) ""(32.305,29.734) ""(32.305,35.48) ""(32.305,41.225) ""(34.076,69.125) ""(34.68,29.734) ""(34.68,41.225) ""(35.895,98.244) ""(35.895,100.619) ""(36.451,69.125) ""(36.451,79.95) ""(36.9,93.775) ""(37.597,41.225) ""(38.826,79.95) ""(39.972,41.225) ""(47.25,75.41) ""(49.625,75.41) ""(49.625,69.125) ""(49.625,71.5)

## Via types
v1: diameter 0.7, hole 0.3, Top Layer to Bottom Layer, tented both sides, 73 vias
v2: diameter 0.7, hole 0.3, Top Layer to Bottom Layer, 67 vias

## Nets (pads, with @x,y where several pads share a name; then routed paths per layer and width w, separated by ;. In a path a pad name is that pad's centre, name@x,y a point inside that pad or via, vN(x,y) a via of type N, cw(c..) or ccw(c..) an arc to the next point about the centre after c; other vN are vias at no path point)
11: IC2.1 IC4.9 IC4.19 IC5.8 IC5.20 J1.7 | length 76.4
  Top Layer w0.4: IC5.8@20.85,87.22 22.056,87.22 22.706,86.57 v1(25.275,86.57) IC5.20@26.65,86.57 ; J1.7@31.37,132.322 31.37,116.925 v2(43.8,104.495) ; IC4.9@33.35,86.57 37.294,86.57 37.944,85.92 IC4.19@39.15,85.92 40.39,85.92 43.8,89.33 v1(43.8,101.42)
  Bottom Layer w0.4: v1(25.275,86.57) 26.075,85.77 34.039,85.77 34.639,86.37 v1(34.725,86.37) ; v1(43.8,101.42) v2(43.8,104.495)
12: IC3.2 IC4.20 IC4.22 IC5.9 IC5.11 J1.6 | length 76.4
  Top Layer w0.4: IC5.11@20.85,85.27 21.775,85.27 22.225,85.72 v1(22.225,85.92) 22.225,86.12 21.775,86.57 IC5.9@20.85,86.57 ; J1.6@34.262,132.322 36.65,129.934 36.65,117.345 v2(43.8,110.195) ; IC4.20@39.15,86.57 38.225,86.57 37.775,87.02 v1(37.775,87.22) 37.775,87.42 38.225,87.87 IC4.22@39.15,87.87 40.05,87.87 42.65,90.47 v1(42.65,101.42)
  Bottom Layer w0.4: v1(22.225,85.92) 23.445,85.92 24.895,87.37 v1@37.775,87.37 ; v1@37.625,87.37 v1(37.775,87.22) ; v1(42.65,101.42) 42.65,106.827 43.143,107.32 44.407,107.32 44.875,107.788 44.875,109.92 44.6,110.195 v2(43.8,110.195)
13: IC2.2 IC4.11 IC4.21 IC5.10 IC5.22 J1.2 | length 84.3
  Top Layer w0.4: v1@19.5,85.92 IC5.10@20.85,85.92 ; IC5.22@26.65,87.87 27.669,87.87 v1@28.024,88.225 ; J1.2@32.74,129.478 32.74,117.455 v2(43.8,106.395) ; IC4.11@33.35,85.27 v1@34.725,85.27 ; IC4.21@39.15,87.22 v1(40.55,87.22) ; v1(44.95,91.636) v1(44.95,101.42)
  Bottom Layer w0.4: v1(19.475,85.945) 21.755,88.225 25.276,88.225 ; 25.25,88.225 39.545,88.225 v1(40.55,87.22) 38.6,85.27 v1@34.725,85.27 ; v1@40.557,87.213 v1(44.95,91.636) ; v2(43.8,106.395) 44.575,106.395 44.95,106.02 v1(44.95,101.42)
  other v1: 34.725,85.325 28.05,88.225
22: IC3.1 IC4.8 IC4.10 IC5.19 IC5.21 J1.1 | length 62.2
  Top Layer w0.4: IC5.19@26.65,85.92 27.575,85.92 28.025,86.37 v1(28.025,86.57) 28.025,86.77 27.575,87.22 IC5.21@26.65,87.22 ; IC4.10@33.35,85.92 32.425,85.92 31.975,86.37 v1(31.975,86.57) 31.975,86.77 32.425,87.22 IC4.8@33.35,87.22 34.575,87.22 35.525,88.17 35.525,90.7 41.5,96.675 v1(41.5,101.42) ; J1.1@35.48,129.478 35.48,116.615 v2(43.8,108.295)
  Bottom Layer w0.4: v1(28.025,86.57) v1(31.975,86.57) ; v1(41.5,101.42) 41.5,106.808 42.987,108.295 v2(43.8,108.295)
+2.5: C3.1 C6.2 C29.2 C44.2 C58.2 IC8.6 IC11.6 IC12.2 IC14.2 IC15.2 pad.@23.549,69.125 pad.@39.972,41.225 R10.2 | length 8.5
  Top Layer w0.3: v2(21.611,36.355) IC14.2@21.611,37.68 ; v2(38.619,32.855) 38.882,33.118 IC15.2@38.882,33.98
  Bottom Layer w0.6: C29.2@18.324,63.76 18.484,63.92 v2(21.889,63.92)
  Bottom Layer w0.8: v1(37.207,31.337) 38.257,32.387 C58.2@38.257,32.855 v2(38.619,32.855)
  other v2: 43.51,75.41 16.491,76.68
+3.3: C45.1 C50.1 C70.2 IC14.15 J4.35 J4.39 | length 40
  Top Layer w0.3: IC14.15@21.611,33.28 v2(21.611,34.605)
  Top Layer w0.8: v2(28.5,26.25) 29.75,25 29.75,17.25 31.5,15.5 v2(31.5,5)
  Bottom Layer w0.3: C70.2@31.5,3.375 J4.35@31.5,7.35
  Bottom Layer w0.8: v2(21.611,34.605) C50.1@21.611,32.855 21.611,31.389 26.75,26.25 v2(28.5,26.25)
+5: C21.1 C59.2 C60.2 C61.2 IC7.2 IC14.7 IC14.8 pad.@36.451,69.125 R3.2 | length 43.1
  Top Layer w0.3: IC14.8@18.611,37.68 18.611,36.593 v2(18.848,36.355) 19.111,36.618 IC14.7@19.111,37.68
  Top Layer w0.6: pad.@36.451,69.125 36.451,66.099 37.36,65.19 v2(38.11,65.19)
  Bottom Layer w0.2: C61.2@18.724,34.668 C61.2@18.787,34.605
  Bottom Layer w0.6: v1(25.675,42.362) 34.95,51.637 34.95,62.03 v2(38.11,65.19) 41.515,65.19 R3.2@41.675,65.35
  Bottom Layer w0.8: C61.2@18.848,34.668 C59.2@18.848,38.105
+6: C40.2 C41.1 C46.2 C47.2 C95.2 IC13.2 IC15.3 IC15.7 L6.2 | length 28.4
  Top Layer w0.3: v1(38.619,38.105) 38.882,37.842 IC15.7@38.882,36.98 ; IC15.3@39.382,33.98 39.382,33.118 v1(39.645,32.855)
  Top Layer w0.4: IC13.2@20.949,46.055 21.799,46.055 v2(22.124,45.73)
  Top Layer w0.5: v2(32.4,25.2) 32.4,25.1 32.375,25.075 C95.2@32.375,22.775 32.45,22.85 L6.2@32.45,20.675
  Bottom Layer w0.5: v2(32.4,25.2) 39.645,32.445 v1(39.645,32.855)
  Bottom Layer w0.8: C47.2@22.074,44.68 C46.2@22.074,46.43 ; v1(38.619,38.105) 38.619,34.605 C41.1@38.258,34.605 C40.2@40.008,34.605 39.645,34.242 v1(39.645,32.855)
+12: C7.1 C8.2 C9.2 C14.2 C15.2 C16.1 C17.2 C18.1 C19.2 C20.1 C35.1 C36.2 C37.2 C38.1 C42.2 C43.1 C66.2 C67.1 C88.2 IC4.1 IC4.18 IC5.1 IC5.18 IC6.1 IC6.2 IC7.7 IC8.8 IC11.8 IC12.7 IC16.7 IC17.8 L4.2 pad.@10.375,71.5 pad.@31.188,93.775 pad.@49.625,71.5 | length 77.6
  Top Layer w0.3: L4.2@16.4,19.5 16.4,21.675 C88.2@16.425,21.7 16.425,23.025
  Top Layer w0.4: IC5.1@20.85,91.77 v1(20.85,92.45) ; v1(25.275,85.27) IC5.18@26.65,85.27 ; IC6.2@27.8,66.93 IC6.1@27.8,67.58 ; IC4.1@33.35,91.77 v2(33.35,92.45) ; IC4.18@39.15,85.27 40.87,85.27 v1(40.925,85.325)
  Top Layer w0.5: v2(14.7,25.057) 14.7,24.598 16.273,23.025 16.425,23.025
  Bottom Layer w0.3: C67.1@29.145,71.775 v1(29.15,71.77) ; C38.1@43.5,77.095 C38.1@43.5,77.16
  Bottom Layer w0.5: pad.@10.375,71.5 11.1,71.5 12.3,70.3 12.3,58.28 14.7,55.88 v2(14.7,25.057)
  Bottom Layer w0.6: C67.1@29.145,71.775 IC17.8@29.145,73.52
  Bottom Layer w0.8: C36.2@16.489,62.17 v2(16.489,63.92) ; C20.1@16.5,73.245 C19.2@16.5,74.995 ; C15.2@19.975,92.45 C14.2@21.725,92.45 ; C16.1@27.53,65.731 v2(27.53,67.275) ; v1(29.15,71.77) C66.2@30.9,71.77 ; v2(33.35,92.45) C8.2@35.1,92.45 ; C43.1@38.335,44.68 C42.2@38.335,46.43 ; C38.1@43.5,77.16 C37.2@43.5,78.91 ; v2(43.51,65.19) C17.2@43.51,66.94
  other v2: 38.325,45.58 16.491,74.14 43.51,77.95
+12in: C71.2 C89.2 J4.47 L5.1 | length 6.2
  Top Layer w0.5: L5.1@37.041,5.49 37.041,4.578 v2(37.119,4.5) C89.2@37.119,3.4
  Bottom Layer w0.5: C71.2@37.119,3.4 v2(37.119,4.5) 37.119,4.919 37.5,5.3 J4.47@37.5,7.35
+18: C72.2 C82.2 J4.63 L3.1 | length 7.5
  Top Layer w0.5: v2(45.5,5) 45.8,4.7 L3.1@45.8,3.6 C82.2@47.7,3.6
  Bottom Layer w0.5: J4.63@45.5,7.35 v2(45.5,5) 45.775,4.725 C72.2@45.775,3.4
-2: C64.2 C65.1 C108.2 IC15.6 IC15.9 L10.2 | length 16.6
  Top Layer w0.3: IC15.6@39.382,36.98 39.382,37.842 v2(39.645,38.105) ; 47.7,34.1 C108.2@49,34.1 L10.2@51,34.1
  Top Layer w0.5: IC15.9@39.132,35.48 42.619,35.48 43.999,34.1 47.7,34.1
  Bottom Layer w0.8: v2(39.62,35.705) 40.008,36.093 C65.1@40.008,36.355 C64.2@40.008,38.105 v2(39.645,38.105)
-6: C48.2 C49.2 C101.2 IC13.6 L8.2 | length 9.7
  Top Layer w0.4: 15.4,47.4 15.77,47.03 v2(17.074,47.03) 17.399,46.705 IC13.6@18.249,46.705 ; C101.2@15.4,49.675 15.375,49.7 C101.2@15.45,49.7
  Top Layer w0.5: L8.2@13,49.7 C101.2@15.375,49.7 ; 15.4,47.4 15.4,49.65 C101.2@15.45,49.7
  Bottom Layer w0.8: C49.2@17.124,46.43 C48.2@17.124,48.18
-7: C74.2 C96.2 C103.2 J4.51 L7.1 L9.1 | length 28.9
  Top Layer w0.5: v2(39.5,4.95) 41.65,7.1 43.35,7.1 43.375,7.125 49.475,7.125 50.7,8.35 L9.1@50.7,18.1 50.6,18 C103.2@48.5,18
  Bottom Layer w0.5: C74.2@38.937,3.4 38.937,4.387 v2(39.5,4.95) J4.51@39.5,7.2 ; J4.51@39.45,7.15 J4.51@39.5,7.2 ; J4.51@39.5,7.35 J4.51@39.5,7.2
-18: C73.2 C75.2 J4.59 L1.1 | length 42.5
  Top Layer w0.5: L1.1@16.6,14.3 16.6,9.5 17.5,8.6 17.5,5.2 18.8,3.9 22.1,3.9 22.2,3.8 C75.2@23.9,3.8 26.3,3.8 v2(27.9,2.2)
  Bottom Layer w0.5: v2(27.9,2.2) 27.9,2.152 28.252,1.8 43,1.8 43.956,2.756 C73.2@43.956,3.4 43.956,4.544 43.5,5 J4.59@43.5,7.35
-V_AD8676: C1.1 C2.1 C4.2 C5.2 C10.2 C11.2 C12.2 C13.2 C24.2 C25.2 C26.2 C27.2 C30.1 C31.1 C32.1 C33.1 C34.2 C39.1 C62.2 C63.1 C68.2 C69.1 C81.2 IC4.27 IC5.27 IC7.4 IC7.9 IC8.5 IC9.3 IC9.4 IC9.5 IC9.8 IC10.4 IC11.5 IC12.4 IC12.9 IC16.4 IC16.9 IC17.4 L2.2 pad.@10.375,69.125 pad.@28.813,93.775 pad.@49.625,69.125 R11.1 R26.1 | length 85.2
  Top Layer w0.3: C81.2@11.2,37.1 v2(11.2,39.1)
  Top Layer w0.4: IC5.27@26.65,91.12 27.695,91.12 v1(28.025,90.79) ; IC4.27@39.15,91.12 40.195,91.12 v1(40.525,90.79)
  Top Layer w0.6: IC12.9@19.189,64.555 21.094,66.46 v2(21.889,66.46) ; R26.1@26,105.595 R11.1@34,105.595 ; v2(38.11,62.65) 38.905,62.65 IC7.9@40.81,64.555 ; IC16.9@40.81,46.218 42.715,48.123 v2(43.27,48.123)
  Bottom Layer w0.3: v2(43.27,48.123) 43.285,48.107 C62.2@43.285,47.898
  Bottom Layer w0.5: pad.@10.375,69.125 10.425,69.075 10.425,39.875 v2(11.2,39.1) ; C27.2@19.984,67.2 C27.2@20.075,67.11
  Bottom Layer w0.6: IC17.4@32.955,78.92 C69.1@32.955,80.64 ; v2(43.27,48.123) 43.3,48.123 v1(49.05,53.873)
  Bottom Layer w0.8: C5.2@15.615,78.43 16.475,78.43 ; v2(16.491,77.95) 16.491,78.414 16.475,78.43 ; C4.2@17.365,78.43 16.491,78.43 16.475,78.43 ; C27.2@20.075,67.11 C26.2@21.824,67.11 21.889,67.045 v2(21.889,66.46) ; C13.2@28.025,89.925 v1(28.025,90.79) C12.2@28.025,91.675 ; C31.1@28.475,108.895 C30.1@30.225,108.895 ; C33.1@29.125,97.895 C32.1@30.875,97.895 ; C39.1@32.7,99.195 C34.2@32.7,100.945 ; C69.1@32.955,80.64 C68.2@34.705,80.64 ; v2(38.11,62.65) 38.11,62.065 C25.2@38.175,62 C24.2@39.925,62 ; C11.2@40.525,89.925 v1(40.525,90.79) C10.2@40.525,91.675 ; C2.1@42.636,73.66 43.51,73.66 43.525,73.66 ; C63.1@43.285,46.43 C62.2@43.285,47.898 ; v2(43.51,74.14) 43.51,73.676 43.525,73.66 ; C1.1@44.386,73.66 43.525,73.66
  other v1: 33.83,80.64 30,97.895 29.35,108.895
  other v2: 32.7,100.07 30,103.395 30.65,105.595
ADC_BUSY: J4.6 R27.2 | length 16.3
  Top Layer w0.5: v2(18.5,24.6) 18.46,24.64 R27.2@18.46,26 R27.2@18.5,25.96
  Bottom Layer w0.5: J4.6@16.5,10.65 16.5,22.2 18.5,24.2 v2(18.5,24.6)
ADC_CNV: J4.2 R30.2 | length 15.9
  Top Layer w0.5: v2(15.9,24.6) 15.9,25.98 R30.2@15.92,26
  Bottom Layer w0.5: J4.2@14.5,10.65 14.5,23.2 v2(15.9,24.6)
ADC_SCK: J4.10 R25.2 | length 16.4
  Top Layer w0.5: v2@21,24.5 R25.2@21,26
  Bottom Layer w0.5: J4.10@18.5,10.65 18.5,22 v2@21,24.5
  other v2: 21,24.6
ADC_SDO: J4.14 R24.2 | length 16.7
  Top Layer w0.5: R24.2@23.54,26 23.6,25.94 v2@23.6,24.5
  Bottom Layer w0.5: J4.14@20.5,10.65 20.5,21.4 v2@23.6,24.5
  other v2: 23.6,24.6
DIG_DEMOD: J2.1 J3.1 | length 32.5
  Top Layer w0.6: J2.1@13.75,57.105 J3.1@46.25,57.105
MUX_A0: J4.30 R14.1 R15.1 | length 91.3
  Bottom Layer w0.2: R15.1@53.3,86.51 55.1,86.51
  Bottom Layer w0.3: 30.8,21.8 34,21.8 55.7,43.5 55.7,86 55.19,86.51 55.1,86.51
  Bottom Layer w0.5: J4.30@28.5,10.65 28.5,19.9 30.4,21.8 30.8,21.8
MUX_A1: J4.26 R13.1 R16.1 | length 89.1
  Bottom Layer w0.2: R16.1@53.3,83.97 54.5,83.97
  Bottom Layer w0.3: 30,22.8 33.9,22.8 55.2,44.1 55.2,83.4 54.63,83.97 54.5,83.97
  Bottom Layer w0.5: J4.26@26.5,10.65 26.5,19.2 26.8,19.5 26.8,19.6 30,22.8
MUX_A2: J4.22 R12.1 R17.1 | length 87
  Bottom Layer w0.2: R17.1@53.3,81.43 54.1,81.43
  Bottom Layer w0.3: 29,23.6 33.7,23.6 54.5,44.4 54.5,81.2 54.27,81.43 54.1,81.43
  Bottom Layer w0.5: J4.22@24.5,10.65 24.5,19.1 29,23.6
NetC21_2: C21.2 IC7.6 R3.1 | length 3.7
  Bottom Layer w0.6: C21.2@39.925,63.75 40.095,63.92 v2(43.51,63.92)
NetC28_1: C28.1 IC10.2 pad.@35.895,98.244 R11.2 T1.3 | length 17.9
  Top Layer w0.6: IC10.2@32.7,97.53 33.43,97.53 34,98.1 ; pad.@35.895,98.244 34,98.244 R11.2@34,102.595 35.495,102.595 36.9,104 T1.3@36.9,105.245
  Bottom Layer w0.6: T1.3@36.98,105.045 36.9,104.965 36.9,102.595 36.9,101.625 C28.1@38.25,100.275
NetC28_2: C28.2 IC10.1 R8.1 | length 8.7
  Top Layer w0.6: IC10.1@32.7,96.26 37.18,96.26 v2(38.25,97.33) R8.1@38.25,98.645
  Bottom Layer w0.6: v2(38.25,97.33) C28.2@38.25,98.675
NetC29_1: C29.1 IC12.6 R10.1 | length 3.7
  Bottom Layer w0.6: v2(16.489,65.19) 19.904,65.19 R10.1@20.074,65.36
NetC51_1: C51.1 R22.2 R23.1 | length 18.4
  Top Layer w0.2: R22.2@31,46.105 R22.2@31,46.182
  Top Layer w0.6: C51.1@17.689,54.705 20.55,54.705 v1(26.575,48.681) ; v1(28.501,48.681) R22.2@31,46.182
  Top Layer w0.8: R22.2@31,46.105 R23.1@32.5,46.105
  Bottom Layer w0.6: v1(26.575,48.681) 26.577,48.682 v1@28.501,48.682
NetC51_2: C51.2 IC16.2 IC16.6 J3.3 | length 46.9
  Top Layer w0.3: IC16.6@38.11,46.853 IC16.6@38.523,46.853
  Top Layer w0.4: IC16.6@38.523,46.853 v1@39.796,48.126
  Top Layer w0.6: C51.2@22.689,54.705 23.865,55.88 44.175,55.88 46.25,53.805 v2(46.25,45.583) IC16.2@43.51,45.583
  Bottom Layer w0.6: v1@39.796,48.126 45.575,53.905 v2(46.25,53.905)
  other v1: 39.8,48.123